# Altium PCB MED_BOX.PcbDoc
Units mm, origin at the board's own origin, x right, y up, seen from the top; angles counter-clockwise.
Board outline 45.42 x 83.83 mm, 2 copper layers (Top Layer, Bottom Layer); 54 components, 50 nets, 225 pads, 235 vias.
Unrouted connection lines stored in the file: 5.
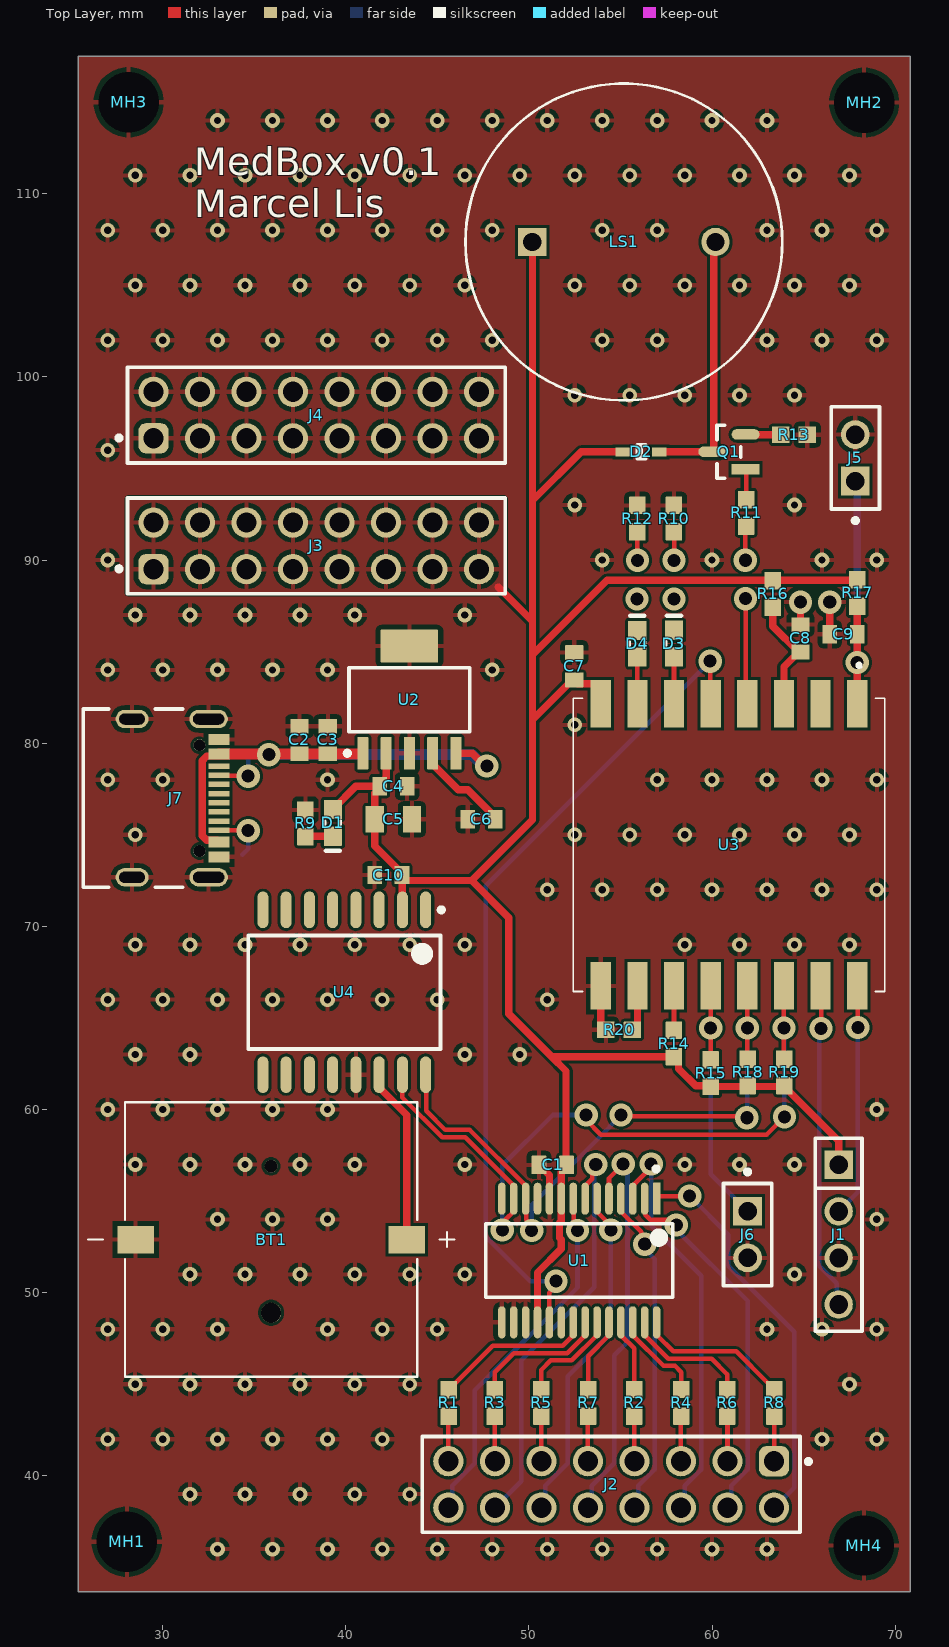
[diagram p0: Top Layer view]
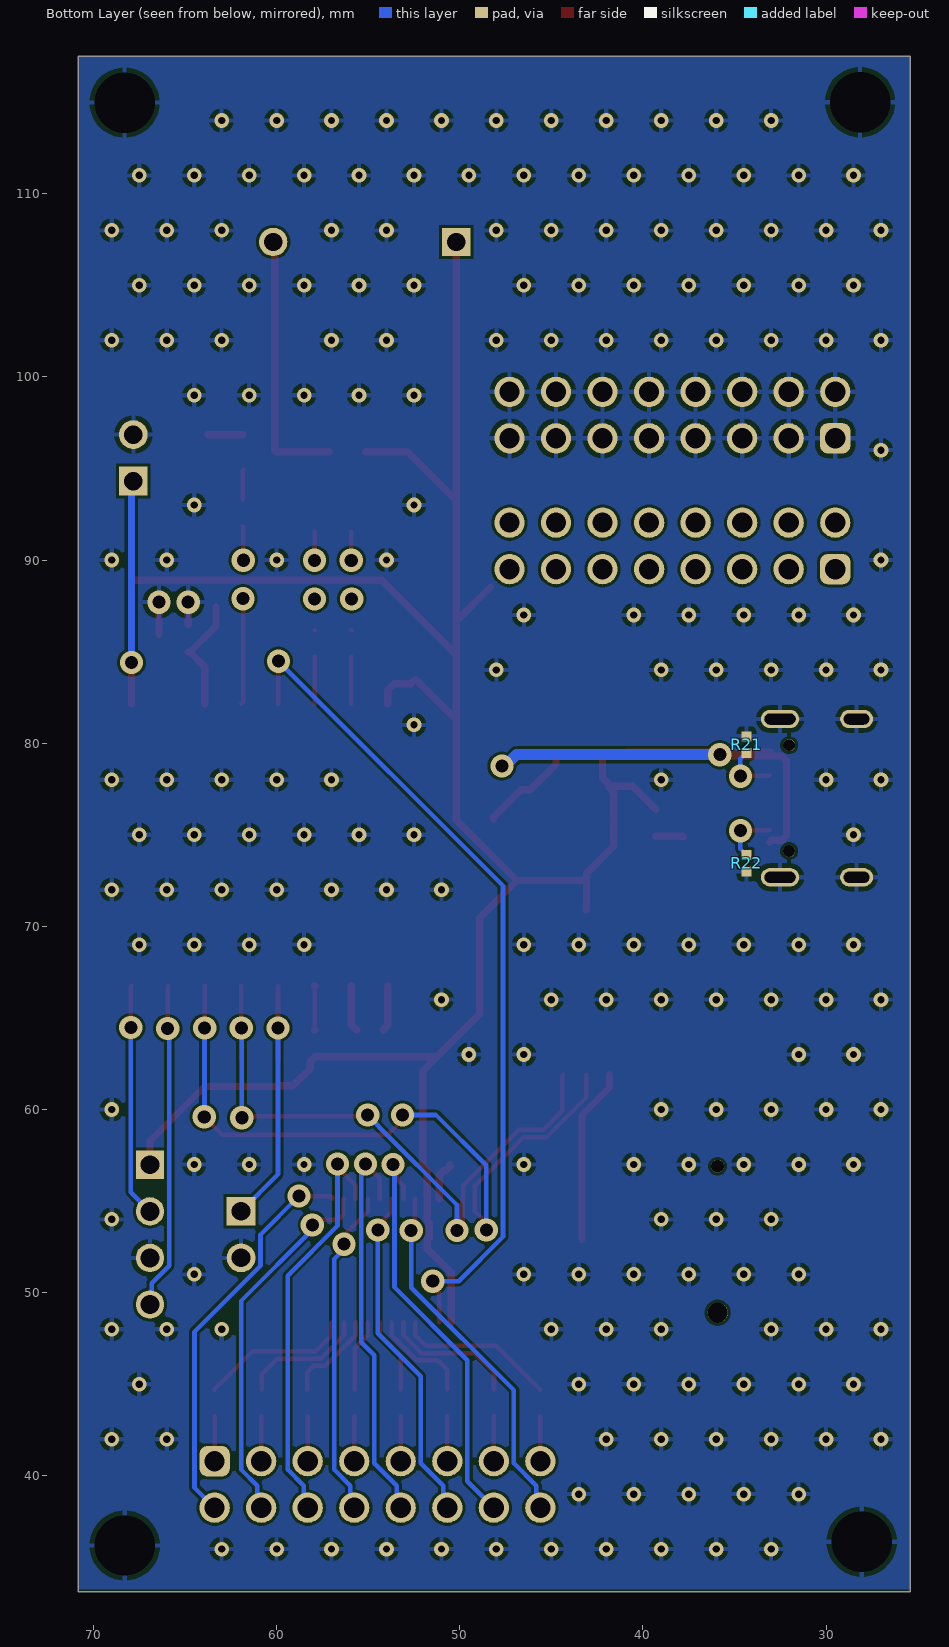
[diagram p1: Bottom Layer view, seen from below]
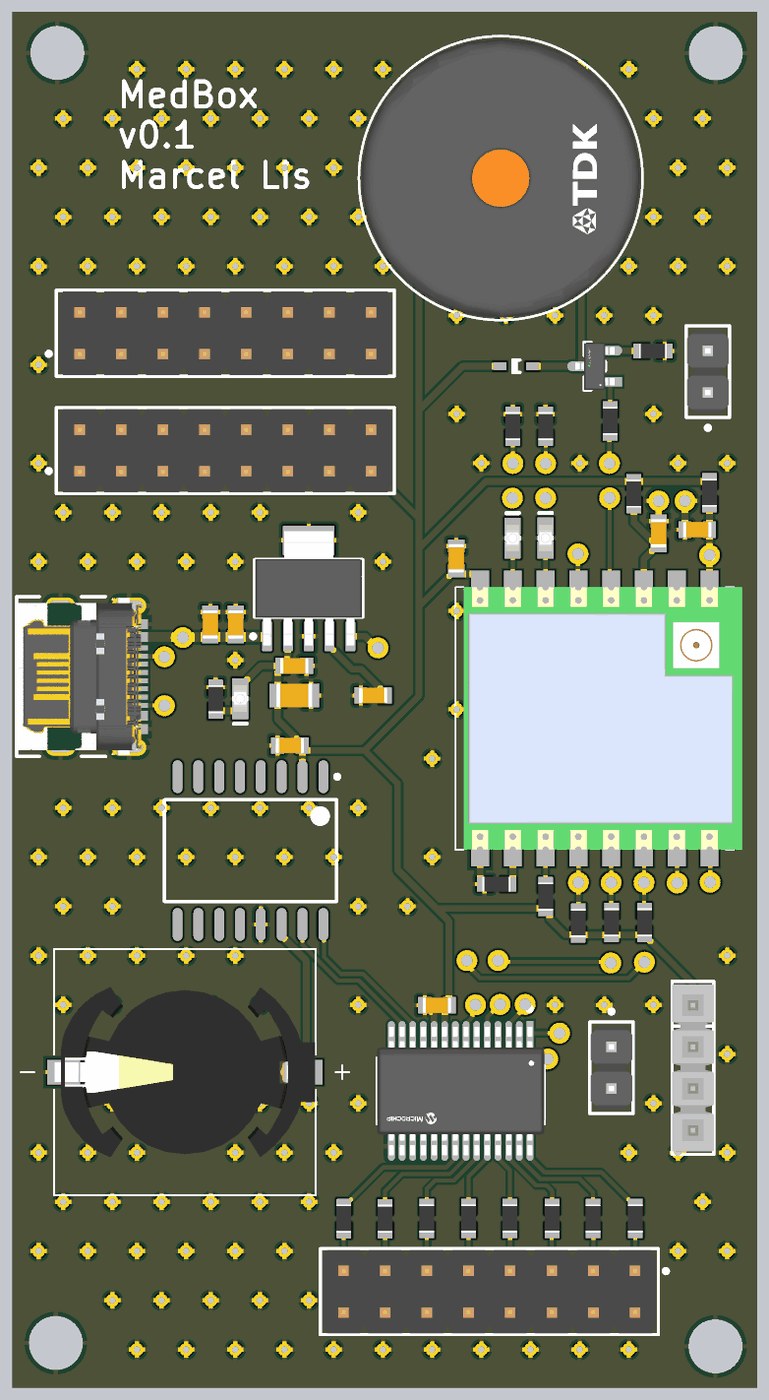
[diagram p2: 3D render of the assembled board from above, using the file's embedded part models]

## Layer stack, top to bottom
Top Solder: solder mask 0.0102, Solder Resist, Dk 3.5
Top Layer: signal copper 0.0356
Dielectric 1: dielectric 0.32, FR-4, Dk 4.8
Bottom Layer: signal copper 0.0356
Bottom Solder: solder mask 0.0102, Solder Resist, Dk 3.5

## Board outline
25.4,33.675 25.4,117.5 70.825,117.5 70.825,33.675

## Design rules (kind name [scope] priority, off if disabled: settings)
Clearance [All] p1: gap=0.15 ignorepadtopadclearanceinfootprint=FALSE
PlaneConnect [All] p1: planeconnectstyle=Direct reliefexpansion=0.508 reliefentries=4 reliefconductorwidth=0.254 reliefairgap=0.254
PolygonConnect [All] p1: connectstyle=Relief reliefconductorwidth=0.254 reliefentries=4 polygonreliefangle="90 Angle" airgapwidth=0.254
RoutingVias [All] p1: holewidth=0.3 width=0.6 viastyle="Through Hole" minholewidth=0.3 minwidth=0.6 maxholewidth=0.3 maxwidth=0.6
SolderMaskExpansion [All] p1: expansion=0.102 istentingtop=FALSE
SupplyNets "Schematic Supply Nets_2" [InNet('GND')] p1: voltage=0.000
SupplyNets "Schematic Supply Nets_1" [InNet('VCC')] p2: voltage=0.000
SupplyNets "Schematic Supply Nets" [InNet('+V_USB')] p3: voltage=0.000
Width [All] p1: maxlimit=0.8 minlimit=0.2 preferedwidth=0.25 minimp=50.000000 maximp=50.000000 favimp=50.000000
29 further rules are at their usual default settings.

## Classes and differential pairs
component class USB: J7 R21 R22
component class RTC: BT1 C10 U4
component class MED_BOX: J1 J2 J3 J4 MH1 MH2 MH3 MH4
component class Designator: C1 R1 R2 R3 R4 R5 R6 R7 R8 U1

## Components (designator, comment, footprint, x,y, rotation, side; value= is the part's Value field where it differs from the comment)
BT1 "1072" BAT_1072 35.925,52.9 r180 top
C1 "100n" C0603 51.3,56.975 r0 top
C2 "1u" C0603 37.474,80.175 r270 top
C3 "100n" C0603 39.025,80.175 r270 top
C4 "100n" C0603 42.6,77.65 r180 top
C5 "10u" C0805 42.6,75.85 r180 top
C6 "10n" C0603 47.411,75.85 r0 top
C7 "100n" C0603 52.475,84.2 r270 top
C8 "100n" C0603 64.825,85.725 r270 top
C9 "100n" C0603 67.175,85.95 r0 top
C10 "100n" C0603 42.325,72.8 r0 top
D1 "LED" LED0603 39.3,75.65 r90 top
D2 "1N4148WT" FAIR-SOD-523F-2_V 56.125,95.907 r0 top
D3 "LED" LED0603 57.921,85.441 r270 top
D4 "LED" LED0603 55.919,85.433 r270 top
J1 "GoldPin 4x1" SMTC-TSW-104-08-X-S 66.912,56.975 r270 top
J2 "61301621121" 61301621121 54.491,39.528 r180 top
J3 "61301621121" 61301621121 38.39,90.77 r0 top
J4 "61301621121" 61301621121 38.39,97.916 r0 top
J5 "M20-9990246" FP-M20-9990246-MFG 67.821,95.578 r90 top
J6 "M20-9990246" FP-M20-9990246-MFG 61.94,53.17 r270 top
J7 "USB4105-GF-A" FP-USB4105-GF-A-MFG 29.499,76.998 r270 top
LS1 "LD-BZPN-1307-A" FP-PS1720P02-MFG 55.187,107.365 r0 top
MH1 "M3 Mounting Hole" "Copy of M4 Mounting Hole" 28.05,36.4 r0 top
MH2 "M3 Mounting Hole" "Copy of M4 Mounting Hole" 68.3,114.975 r0 top
MH3 "M3 Mounting Hole" "Copy of M4 Mounting Hole" 28.144,114.994 r0 top
MH4 "M3 Mounting Hole" "Copy of M4 Mounting Hole" 68.288,36.194 r0 top
Q1 "BSS138" FP-318-08-IPC_B 60.92,95.907 r180 top
R1 "330R" R0603 45.621,43.979 r270 top
R2 "330R" R0603 55.743,43.985 r270 top
R3 "330R" R0603 48.133,43.977 r270 top
R4 "330R" R0603 58.317,43.987 r270 top
R5 "330R" R0603 50.676,43.986 r270 top
R6 "330R" R0603 60.818,43.98 r270 top
R7 "330R" R0603 53.23,43.984 r270 top
R8 "330R" R0603 63.406,43.985 r270 top
R9 "1k" R0603 37.8,75.625 r270 top
R10 "1k" R0603 57.921,92.259 r90 top
R11 "1k" R0603 61.86,92.575 r270 top
R12 "1k" R0603 55.919,92.259 r90 top
R13 "10k" R0603 64.469,96.836 r180 top
R14 "10k" R0603 57.921,63.6 r270 top
R15 "10k" R0603 59.926,61.983 r270 top
R16 "10k" R0603 63.312,88.152 r90 top
R17 "10k" R0603 67.925,88.2 r90 top
R18 "4k7" R0603 61.94,62.025 r270 top
R19 "4k7" R0603 63.95,62.025 r270 top
R20 "10k" R0603 54.925,64.35 r0 top
R21 "5k1" R0402 34.35,79.925 r90 bottom
R22 "5k1" R0402 34.35,73.45 r270 bottom
U1 "MCP23017T-E/SS" FP-C04-073-IPC_C 52.746,51.756 r270 top
U2 "TPS73718DCQR" DCQ0006A_L 43.475,82.375 r90 top
U3 "ESP8266_ESP-07" ESP8266ESP07 60.925,74.45 r270 top
U4 "DS3231SN#" W16#H2_L 39.92,66.4 r270 top

## Footprints (in the part's own frame and the unit in brackets; to place one, negate y for a bottom-side part, rotate by r counter-clockwise, add the part's x,y. Pads: shape width x height; smd on the part's side, far side on the other; paste and mask are expansions set on the pad)
61301621121 [mm] "Pin Header, pitch 2.54 mm, THT, Vertical, dual row, 16p"
  rrect50% 1.65x1.65 hole 1.1: 1(-8.89,-1.27)
  round 1.65 hole 1.1: 2(-8.89,1.27) 3(-6.35,-1.27) 4(-6.35,1.27) 5(-3.81,-1.27) 6(-3.81,1.27) 7(-1.27,-1.27) 8(-1.27,1.27) 9(1.27,-1.27) 10(1.27,1.27) 11(3.81,-1.27) 12(3.81,1.27) 13(6.35,-1.27) 14(6.35,1.27) 15(8.89,-1.27) 16(8.89,1.27)
  silkscreen extent -10.89,-2.62 10.31,2.62, body extent -10.16,-2.54 10.16,2.54, height 8.59
BAT_1072 [mm]
  rect 2x1.5 smd: N(7.4,0) P(-7.4,0)
  round 1.1 hole 1.1 unplated: ""(0,4)
  round 0.7 hole 0.7 unplated: ""(0,-4)
  silkscreen extent -10,-7.5 10,7.5, body extent -7.95,-5.2 7.95,5.2, height 3.75
C0603 [mm] "Generic 0603 SMD Ceramic Capacitor Footprint"
  rrect5% 0.8x1 smd: 1(-0.75,0) 2(0.75,0)
  body extent -0.87,-0.48 0.87,0.48, height 0.95
C0805 [mm] "Generic 0805 SMD Ceramic Capacitor Footprint"
  rrect5% 1x1.45 smd: 1(-1.016,0) 2(1.016,0)
  body extent -1.1,-0.72 1.1,0.72, height 1.45
"Copy of M4 Mounting Hole" [mm]
  round 0 hole 3.3 unplated mask+0.051: 1(0,0)
DCQ0006A_L [mm] "SOT223, 6-Leads, Body 6.55x3.55mm, Pitch 1.27mm, IPC High Density"
  rrect17% 1.8x0.6 smd: 1(-2.925,2.54) 2(-2.925,1.27) 3(-2.925,0) 4(-2.925,-1.27) 5(-2.925,-2.54)
  rrect6% 1.8x3.15 smd: 6(2.925,0)
  silkscreen extent -3.05,-3.3 1.75,3.51, body extent -3.48,-3.25 3.48,3.25, height 1.64
ESP8266ESP07 [mm]
  rect 2.6x1.1 smd: 1(-7.7,7) 2(-7.7,5) 3(-7.7,3) 4(-7.7,1) 5(-7.7,-1) 6(-7.7,-3) 7(-7.7,-5) 8(-7.7,-7) 9(7.7,-7) 10(7.7,-5) 11(7.7,-3) 12(7.7,-1) 13(7.7,1) 14(7.7,3) 15(7.7,5) 16(7.7,7)
  silkscreen extent -9.9,-8.5 8,8.5, body extent -8,-8 8,9, height 2.21
FAIR-SOD-523F-2_V [mm] "SMD, 2-Leads, Body 1.2x0.8mm, Height 0.7mm"
  rect 0.8x0.5 smd: 1(-1,0) 2(1,0)
  silkscreen extent -0.2,-0.38 0.24,0.38, body extent -0.6,-0.4 0.6,0.4, height 0.71
FP-318-08-IPC_B [mm]
  rect 1.524x0.578 smd paste+0 mask+0: 1(-0.91,0.95)
  rrect100% 1.524x0.578 smd paste+0 mask+0: 2(-0.91,-0.95) 3(0.91,0)
  silkscreen extent -0.65,-1.45 0.65,1.45, body extent -1.92,-1.7 1.92,1.7, height 0.25
FP-C04-073-IPC_C [mm]
  rect 1.753x0.415 smd paste+0 mask+0: 1(-3.375,4.225)
  rrect100% 1.753x0.415 smd paste+0 mask+0: 2(-3.375,3.575) 3(-3.375,2.925) 4(-3.375,2.275) 5(-3.375,1.625) 6(-3.375,0.975) 7(-3.375,0.325) 8(-3.375,-0.325) 9(-3.375,-0.975) 10(-3.375,-1.625) 11(-3.375,-2.275) 12(-3.375,-2.925) 13(-3.375,-3.575) 14(-3.375,-4.225) 15(3.375,-4.225) 16(3.375,-3.575) 17(3.375,-2.925) 18(3.375,-2.275) 19(3.375,-1.625) 20(3.375,-0.975) 21(3.375,-0.325) 22(3.375,0.325) 23(3.375,0.975) 24(3.375,1.625) 25(3.375,2.275) 26(3.375,2.925) 27(3.375,3.575) 28(3.375,4.225)
  silkscreen extent -5.13,-5.1 2,5.1, body extent -4.35,-5.2 4.35,5.2, height 0.25
FP-M20-9990246-MFG [mm]
  rect 1.57x1.57 hole 1.02 paste-2539.97 mask+0: 1(-1.27,0)
  round 1.57 hole 1.02 paste-2539.97 mask+0: 2(1.27,0)
  silkscreen extent -3.55,-1.32 2.79,1.32, body extent -2.89,-1.42 2.89,1.42, height 0.25
FP-PS1720P02-MFG [mm]
  rect 1.55x1.55 hole 1 paste-2539.97 mask+0: 1(-5,0)
  round 1.55 hole 1 paste-2539.97 mask+0: 2(5,0)
  silkscreen extent -8.65,-8.65 8.65,8.65, body extent -8.75,-8.75 8.75,8.75, height 0.25
FP-USB4105-GF-A-MFG [mm]
  rrect100% 1x2.1 hole 1.7 slot 0.6 at 0 deg paste-2539.97 mask+0: 1(-4.32,3.015) 2(4.32,3.015)
  rrect100% 1x1.8 hole 1.4 slot 0.6 at 0 deg paste-2539.97 mask+0: 3(-4.32,-1.165) 4(4.32,-1.165)
  rect 0.6x1.15 smd paste+0 mask+0: A1-B12(-3.2,3.59) A4-B9(-2.4,3.59) B1-A12(3.2,3.59) B4-A9(2.4,3.59)
  rect 0.3x1.15 smd paste+0 mask+0: A5(-1.25,3.59) A6(-0.25,3.59) A7(0.25,3.59) A8(1.25,3.59) B5(1.75,3.59) B6(0.75,3.59) B7(-0.75,3.59) B8(-1.75,3.59)
  round 0.65 hole 0.65 unplated paste-2539.97 mask+0: ""(-2.89,2.515) ""(2.89,2.515)
  silkscreen extent -4.86,-3.84 4.86,1.59, body extent -4.96,-3.94 4.96,4.27, height 0.25
LED0603 [mm] "0603 LED footprint"
  rrect5% 1.05x1 smd: A(0.725,0) K(-0.725,0)
  silkscreen extent -1.52,-0.42 0.11,0.43, body extent -0.81,-0.41 0.81,0.41, height 0.95
R0402 [mm] "Generic 0402 Resistor Footprint"
  rrect5% 0.55x0.55 smd: 1(-0.45,0) 2(0.45,0)
  body extent -0.53,-0.28 0.53,0.28, height 0.37
R0603 [mm] "Generic 0603 Resistor Footprint"
  rrect5% 0.95x0.9 smd: 1(-0.725,0) 2(0.725,0)
  body extent -0.85,-0.45 0.85,0.45, height 0.55
SMTC-TSW-104-08-X-S [mm] ".025 SQ Post Terminal Strip Assembly, 1x4 Pins, Vertical, 2.54mm Pitch, Male"
  rect 1.55x1.55 hole 1.02: 1(0,0)
  round 1.55 hole 1.02: 2(2.54,0) 3(5.08,0) 4(7.62,0)
  silkscreen extent -1.46,-1.27 9.08,1.27, body extent -1.27,-1.27 8.89,1.27, height 8.38
W16#H2_L [mm] "SOIC, 16-Leads, Body 10.3x7.5mm, Pitch 1.27mm, IPC High Density"
  oval 2x0.6 smd: 1(-4.5,4.445) 2(-4.5,3.175) 3(-4.5,1.905) 4(-4.5,0.635) 5(-4.5,-0.635) 6(-4.5,-1.905) 7(-4.5,-3.175) 8(-4.5,-4.445) 9(4.5,-4.445) 10(4.5,-3.175) 11(4.5,-1.905) 12(4.5,-0.635) 13(4.5,0.635) 14(4.5,1.905) 15(4.5,3.175) 16(4.5,4.445)
  silkscreen extent -4.62,-5.25 3.1,5.42, body extent -3.8,-5.25 3.8,5.25, height 2.65

## Part data
BT1: "Battery Holder CR1220/1225", Package="NON STANDARD-2 Keystone", Check_prices=https://www.snapeda.com/parts/1072/Keystone/view-part/?ref=eda, MF="Keystone Electronics", MP=1072, SnapEDA_Link=https://www.snapeda.com/parts/1072/Keystone/view-part/?ref=snap
C1 C2 C3 C4 C6 C7 C8 C9 C10: library part CMP-00024-8, "Generic 0603 SMD Ceramic Capacitor"
C5: library part CMP-00025-5, "Generic 0805 SMD Ceramic Capacitor"
D1 D3 D4: library part CMP-00036-7, "0603 LED"
D2: library part CMP-0881-00001-1, "High Conductance Fast Switching Diode, 75 V, -55 to 150 degC, 2-Pin SOD523F, RoHS", Manufacturer="Fairchild Semiconductor", Temperature Range="-55 to 150 degC", BVR (IR="5 uA)=75 V Min.", CO="4 pF Max.", ComponentLink1Description="Manufacturer URL", ComponentLink1URL=http://www.fairchildsemi.com/, ComponentLink2Description=Datasheet, ComponentLink2URL=http://www.fairchildsemi.com/ds/1N/1N4148WT.pdf, DatasheetVersion="Rev. A2", IR (VR="75 V)=5 uA Max.", Mounting Technology="Surface Mount", PackageDescription="2-Pin Surface Mount Device, Body 1.2 x 0.8 mm, Height 0.7 mm", PackageReference=SOD-523F-2, PartNumber=1N4148WT, RoHS=TRUE, VF="1 V Max."
J1: library part CMP-00067-4, "TSW - Samtec 2.54mm Pin Header 13.46mm Overall Pin Length 5.08mm Tail (08) (mcv)(TO22)", Manufacturer=Molex
J2 J3 J4: library part CMP-1502-01097-4, "THT Vertical Pin Header WR-PHD, Pitch 2.54 mm, Dual Row, 16 pins", Color=Black, Contact Resistance=20mΩ, Current Rating=3A, Max Operating Temperature=105°C, Min Operating Temperature=-40°C, Operating Supply Voltage=250V, Connector Type="Male Pin", Contact Material=Gold, Contact Mating Length=5.9944mm, Contact Plating=Gold, Gender=Male, Height=8.89mm, Lead Pitch=2.54mm, Mount="Through Hole", Number Of Contacts=16, Number of Pins=16, Number of Positions=16, Number Of Rows=2, Orientation=Vertical, Packaging=Bulk, Pitch=2.54mm, RoHS=Compliant, Row Spacing=2.54mm, Termination=Solder, Voltage Rating=250V
J5 J6: library part CMP-15831-000009-1, "CONN HEADER VERT 2POS 2.54MM", Current Rating=3A, Manufacturer=Harwin, Temperature="-40°C to +105°C", Temperature Range High=+105°C, Temperature Range Low=-40°C, Automotive=No, Category=Conn, ComponentLink2Description=Datasheet, ComponentLink2URL=https://cdn.harwin.com/pdfs/M20-999.pdf, Conn Gender=Male, Conn Orientation=Vertical, Contact Material=Tin,Nickel, Device Class L1=Connectors, Device Class L2="Headers and Wire Housings", Device Class L3=unset, Digikey Description="CONN HEADER VERT 2POS 2.54MM", Height=8.99mm, Lead Free=Yes, Manufacturer Part Number=M20-9990246, Mouser Description="2.54mm (0.1\") Pitch SIL Vertical PC Tail Pin Header, 6.1mm mating pin height, tin, 2 contacts", Number Of Contacts=2, Number Of Rows=1, Octopart=https://octopart.com/m20-9990246-harwin-2590635, Package=M20-9990246, Pitch=2.54mm, RoHS=TRUE
J7: library part CONN-00045-1, "USB Connector, 24 Contact(s), Female, Right Angle, Solder Terminal, Locking, Receptacle", Manufacturer=GCT, Manufacturer PN=USB4105-GF-A, Supplier=Mouser, Supplier PN=640-USB4105-GF-A
LS1: library part CMP-08413-000001-1, "AUDIO PIEZO TRANSDUCER 30V TH", Frequency=2kHz, Manufacturer="TDK Corporation", Manufacturer Part Number=PS1720P02, Package=0, Temperature="-10°C to +70°C", Temperature Range High=+70°C, Temperature Range Low=-10°C, Automotive=No, Category=Speak, ComponentLink2Description=Datasheet, ComponentLink2URL=https://product.tdk.com/info/en/catalog/datasheets/piezoelectronic_buzzer_ps_en.pdf, Device Class L1=Electromechanical, Device Class L2="Audio Products", Device Class L3=Buzzers, Digikey Description="AUDIO PIEZO TRANSDUCER 30V TH", Height=8.3mm, Lead Free=Yes, Mouser Description="Audio Indicators & Alerts Round 17mmx8mm 2 kHz Vin=3V", Octopart=https://octopart.com/ps1720p02-tdk-154429, RoHS=TRUE, Standoff Height=0.5mm
MH1 MH2 MH3 MH4: library part CONN-00002-1, Manufacturer=Molex
Q1: library part CMP-07173-000101-1, "MOSFET N-CH 50V 220MA SOT-23", Case/Package=SOT-23, Continuous Drain Current (ID)=220mA, Drain to Source Breakdown Voltage=50V, Drain to Source Resistance=3.5R, Gate to Source Voltage (Vgs)=20V, Input Capacitance=27pF, Max Operating Temperature=150°C, Max Power Dissipation=360mW, Min Operating Temperature=-55°C, On-State Resistance=6R, Package Quantity=1, Threshold Voltage=1.3V, Contact Plating=Tin, Current Rating=220mA, Drain to Source Voltage (Vdss)=50V, Dual Supply Voltage=50V, Element Configuration=Single, Fall Time=9ns, Height=0.93mm, Lead Free="Lead Free", Length=2.92mm, Mount="Surface Mount", Nominal Vgs=1.3V, Number of Elements=1, Number of Pins=3, Packaging="Tape and Reel", Power Dissipation=360mW, Radiation Hardening=No, Rds On Max=3.5R, REACH SVHC="No SVHC", Rise Time=9ns, Termination=SMD/SMT, Turn-Off Delay Time=20ns, Turn-On Delay Time=2.5ns, Voltage Rating (DC)=50V, Weight=0.03g, Width=1.3mm
R1 R2 R3 R4 R5 R6 R7 R8 R9 R10 R11 R12 R13 R14 R15 R16 R17 R18 R19 R20: library part CMP-00017-10, "Generic 0603 SMD Resistor"
R21 R22: library part CMP-00016-10, "Generic 0402 SMD Resistor"
U1: library part CMP-0186-00065-3, "IC I/O EXPANDER 16BIT I2C 28SSOP", Case/Package=SSOP, Frequency=1.7MHz, Max Frequency=10MHz, Max Operating Temperature=125°C, Min Operating Temperature=-40°C, Nominal Supply Current=1mA, Operating Supply Voltage=5.5V, Output Current=25mA, Package Quantity=2100, Power Dissipation=700mW, Interface=I2C, Lead Free="Lead Free", Mount="Surface Mount", Number of Bits=16, Number of Channels=1, Number of I/Os=16, Number of Pins=28, Packaging="Tape and Reel"
U2: library part CMP-0395-00291-2, "Single Output LDO, 1 A, Fixed 1.8 V Output, 2.2 to 5.5 V Input, with Reverse Current Protection, 6-pin SOT-223 (DCQ), -40 to 125 degC, Green (RoHS & no Sb/Br)", Manufacturer="Texas Instruments", Rating=Catalog, Accuracy(%)=3, ComponentLink1Description="Manufacturer URL", ComponentLink1URL=http://www.ti.com/, ComponentLink2Description=Datasheet, ComponentLink2URL=http://www.ti.com/general/docs/lit/getliterature.tsp?genericPartNumber=TPS73718&fileType=pdf, ComponentLink3Description="Package Specification", ComponentLink3URL=http://www.ti.com/litv/pdf/mpds098c, DatasheetVersion=SBVS067O, Eco-Plan="Green (RoHS & no Sb/Br)", Fixed Output Options(V)=1.8, Iout(Max)(A)=1, Iq(Typ)(mA)=0.3, Mounting Technology="Surface Mount", PackageDescription="6-Pin Plastic Small Outline, Body 3.5 x 6.5 mm, Pitch 1.27 mm", PackageReference=DCQ0006A, PackageVersion=4202109/D, PartNumber=TPS73718DCQR, SubFamily="Single Channel LDO", Vdo(Typ)(mV)=130, Vin(Max)(V)=5.5, Vin(Min)(V)=2.2, Vout Adj(Max)(V)=1.8, Vout Adj(Min)(V)=1.8
U3: "Connector", Manufacturer_Name=Ai-Thinker, Manufacturer_Part_Number="ESP8266 ESP-07", Datasheet Link=http://datasheet.octopart.com/ESP-07S-RF-Solutions-datasheet-104506015.pdf, Height=3mm
U4: library part CMP-0254-00293-2, "Extremely Accurate I2C-Integrated Real-Time Clock/TCXO/Crystal, 16-Pin SO, -40 to 85 degC, RoHS Qualified", Code_IPC=SOIC127P1030-16, Code_JEDEC=MS-013-AA, ComponentLink1Description="Manufacturer URL", ComponentLink1URL=http://www.maxim-ic.com, ComponentLink2Description=Datasheet, ComponentLink2URL=http://datasheets.maxim-ic.com/en/ds/DS3231.pdf, ComponentLink3Description="Package Specification", ComponentLink3URL=http://pdfserv.maxim-ic.com/package_dwgs/21-0042.PDF, DatasheetVersion="Rev 8, Jul-2010", PackageDescription="16-Pin Small-Outline IC, Wide (0.3in), 1.27 mm Pitch, SOIC (W), RoHS Qualified", PackageReference=W16#H2, PackageVersion="revD, 2010"

## Via types
v1: diameter 0.8, hole 0.4, Top Layer to Bottom Layer, 201 vias
v2: diameter 1.27, hole 0.711, Top Layer to Bottom Layer, 34 vias

## Nets (pads, with @x,y where several pads share a name; then routed paths per layer and width w, separated by ;. In a path a pad name is that pad's centre, name@x,y a point inside that pad or via, vN(x,y) a via of type N, cw(c..) or ccw(c..) an arc to the next point about the centre after c; other vN are vias at no path point)
+V_USB: C2.2 C3.2 J7.A4-B9 J7.B4-A9 U2.1 U2.5 | length 28.2
  Top Layer w0.4: J7.B4-A9 32.989,74.698 32.419,74.698 32.164,74.954 32.164,79.043 32.419,79.298 32.989,79.298 J7.A4-B9 ; U2.1@40.883,79.398 U2.1 ; U2.5 46.915,79.45 47.615,78.75 v2(47.7,78.75)
  Top Layer w0.6: J7.A4-B9 U2.1@40.883,79.398
  Bottom Layer w0.6: v2(35.8,79.375) 46.894,79.375 47.519,78.75 v2(47.7,78.75)
A0: R1.1 U1.21 | length 8.7
  Top Layer w0.25: R1.1 45.621,44.729 45.946,45.054 45.971,45.054 48.017,47.1 51.842,47.1 52.421,47.679 U1.21
A1: R3.1 U1.22 | length 7.4
  Top Layer w0.25: R3.1 48.133,45.658 49.175,46.7 52.092,46.7 53.071,47.679 U1.22
A2: R5.1 U1.23 | length 5.6
  Top Layer w0.25: R5.1 50.676,45.776 51.2,46.3 52.342,46.3 53.721,47.679 U1.23
A3: R7.1 U1.24 | length 4.1
  Top Layer w0.25: R7.1 53.23,46.538 54.371,47.679 U1.24
A4: R2.1 U1.25 | length 4
  Top Layer w0.25: U1.25 55.021,47.679 55.743,46.957 R2.1
A5: R4.1 U1.26 | length 5.1
  Top Layer w0.25: U1.26 55.671,47.679 57.35,46 57.975,46 58.317,45.658 R4.1
A6: R6.1 U1.27 | length 6.9
  Top Layer w0.25: U1.27 56.321,47.679 57.6,46.4 59.973,46.4 60.818,45.555 R6.1
A7: R8.1 U1.28 | length 8.4
  Top Layer w0.25: U1.28 57.021,48.33 57.021,47.654 57.875,46.8 61.316,46.8 63.056,45.06 63.081,45.06 63.406,44.735 R8.1
BOOT: J6.1 R15.1 U3.12 | length 14.9
  Top Layer w0.25: U3.12 v2(59.925,64.45) 59.925,62.709 R15.1
  Bottom Layer w0.25: v2(59.925,64.45) 59.925,56.455 J6.1
BUTTON_B0: J2.2 U1.1 | length 21.7
  Top Layer w0.25: U1.1 56.971,55.193 57.053,55.275 v2(58.775,55.275)
  Bottom Layer w0.25: v2(58.775,55.275) 60.88,53.17 60.88,51.461 64.481,47.859 64.481,39.358 J2.2
BUTTON_B1: J2.4 U1.2 | length 20.3
  Top Layer w0.25: U1.2 56.352,55.099 56.352,54.248 56.621,53.979 57.495,53.979 57.774,53.7 v2(58.05,53.7)
  Bottom Layer w0.25: v2(58.05,53.7) 58.05,53.438 61.941,49.546 61.941,40.342 61.057,39.458 61.057,38.474 J2.4
BUTTON_B2: J2.6 U1.3 | length 22.7
  Top Layer w0.25: U1.3 55.671,55.844 56.675,56.849 v2(56.675,57.025)
  Bottom Layer w0.25: v2(56.675,57.025) 56.675,53.65 59.401,50.924 59.401,40.342 58.517,39.458 58.517,38.474 J2.6
BUTTON_B3: J2.8 U1.4 | length 18.1
  Top Layer w0.25: U1.4 55.021,54.429 56.13,53.32 56.13,52.845 v2(56.325,52.65)
  Bottom Layer w0.25: J2.8 55.977,38.474 55.977,39.458 56.861,40.342 56.861,51.838 56.325,52.374 v2(56.325,52.65)
BUTTON_B4: J2.10 U1.5 | length 22
  Top Layer w0.25: U1.5 54.371,56.246 v2(55.15,57.025)
  Bottom Layer w0.25: J2.10 53.437,38.474 53.437,39.458 54.661,40.682 54.661,46.579 55.383,47.3 55.383,56.516 55.15,56.749 v2(55.15,57.025)
BUTTON_B5: J2.12 U1.6 | length 18.8
  Top Layer w0.25: U1.6 53.721,54.417 54.472,53.666 v2(54.472,53.425)
  Bottom Layer w0.25: J2.12 50.897,38.474 50.897,39.458 52.121,40.682 52.121,45.437 54.472,47.788 v2(54.472,53.425)
BUTTON_B6: J2.14 U1.7 | length 23.1
  Top Layer w0.25: U1.7 53.071,55.844 53.455,56.228 53.455,56.805 v2(53.65,57)
  Bottom Layer w0.25: J2.14 49.581,39.698 49.581,46.312 53.562,50.293 53.562,56.912 v2(53.65,57)
BUTTON_B7: J2.16 U1.8 | length 19.9
  Top Layer w0.25: U1.8 52.449,55.102 52.449,53.879 52.652,53.676 v2(52.652,53.4)
  Bottom Layer w0.25: J2.16 45.817,38.474 45.817,39.458 47.041,40.682 47.041,44.666 52.652,50.277 v2(52.652,53.4)
BUZZER: R11.2 U3.4 | length 7.7
  Top Layer w0.25: v2(61.816,89.987) 61.816,91.806 R11.2 ; v2(61.832,87.887) 61.832,82.243 U3.4
EN: C8.2 R16.1 U3.3 | length 6.3
  Top Layer w0.4: R16.1 63.312,86.388 C8.2@64.725,84.975 ; U3.3 63.925,84.175 C8.2@64.725,84.975 ; C8.2 C8.2@64.725,84.975
GND: BT1.N C1.1 C2.1 C3.1 C4.1 C5.1 C6.1 C7.1 C8.1 C9.1 C10.1 J1.3 J4.1 J4.2 J4.3 J4.4 J4.5 J4.6 J4.7 J4.8 J4.9 J4.10 J4.11 J4.12 J4.13 J4.14 J4.15 J4.16 J5.2 J6.2 J7.1 J7.2 J7.3 J7.4 J7.A1-B12 J7.B1-A12 MH1.1 MH2.1 MH3.1 MH4.1 R9.1 R10.2 R12.2 R13.1 R20.1 R21.2 R22.2 U1.10 U1.15 U1.16 U1.17 U2.3 U2.6 U3.9 U4.13 | length 7.6
  Top Layer w0.4: C1.1 50.55,56.875 50.75,56.675 50.85,56.675 51.121,56.404 U1.10 ; U3.9 53.925,64.6 54.175,64.35 R20.1@54.179,64.35 ; C8.1 v2(64.825,87.7) ; C9.1 v2(66.425,87.7)
  other v1: 33,36 36,36 39,36 42,36 45,36 48,36 51,36 54,36 57,36 60,36 63,36 31.5,39 34.5,39 37.5,39 40.5,39 43.5,39 27,42 30,42 33,42 36,42 39,42 42,42 66,42 69,42 28.5,45 31.5,45 34.5,45 37.5,45 40.5,45 43.5,45 67.5,45 27,48 30,48 33,48 39,48 42,48 45,48 63,48 66,48 69,48 31.5,51 34.5,51 37.5,51 40.5,51 43.5,51 46.5,51 64.5,51 33,54 36,54 39,54 69,54 28.5,57 31.5,57 34.5,57 37.5,57 40.5,57 46.5,57 58.5,57 61.5,57 64.5,57 27,60 30,60 33,60 36,60 39,60 69,60 28.5,63 31.5,63 46.5,63 49.5,63 27,66 30,66 33,66 36,66 39,66 42,66 45,66 51,66 28.5,69 31.5,69 34.5,69 37.5,69 40.5,69 43.5,69 46.5,69 58.5,69 61.5,69 64.5,69 67.5,69 51,72 54,72 57,72 60,72 63,72 66,72 69,72 28.5,75 52.5,75 55.5,75 58.5,75 61.5,75 64.5,75 67.5,75 27,78 30,78 39,78 57,78 60,78 63,78 66,78 69,78 52.5,81 27,84 30,84 33,84 36,84 39,84 48,84 28.5,87 31.5,87 34.5,87 37.5,87 40.5,87 46.5,87 27,90 54,90 60,90 66,90 69,90 52.5,93 64.5,93 27,96 52.5,99 55.5,99 58.5,99 61.5,99 64.5,99 27,102 30,102 33,102 36,102 39,102 42,102 45,102 48,102 54,102 57,102 63,102 66,102 69,102 28.5,105 31.5,105 34.5,105 37.5,105 40.5,105 43.5,105 46.5,105 52.5,105 55.5,105 58.5,105 61.5,105 64.5,105 67.5,105 27,108 30,108 33,108 36,108 39,108 42,108 45,108 48,108 54,108 57,108 63,108 66,108 69,108 28.5,111 31.5,111 34.5,111 37.5,111 40.5,111 43.5,111 46.5,111 49.5,111 52.5,111 55.5,111 58.5,111 61.5,111 64.5,111 67.5,111 33,114 36,114 39,114 42,114 45,114 48,114 51,114 54,114 57,114 60,114 63,114
GPIO2: R14.1 U3.11 | length 2.4
  Top Layer w0.25: R14.1@57.923,64.327 U3.11@57.923,66.748
  Top Layer w0.4: R14.1 R14.1@57.923,64.327 ; U3.11@57.923,66.748 U3.11
GPIO12: D3.A U3.6 | length 2.6
  Top Layer w0.25: D3.A 57.921,82.154 U3.6
GPIO13: D4.A U3.7 | length 2.6
  Top Layer w0.25: D4.A 55.919,82.156 U3.7
GPIO15: R20.2 U3.10 | length 2.5
  Top Layer w0.4: R20.2@55.629,64.35 55.654,64.35 55.904,64.6 55.904,64.625 55.925,64.646 U3.10
LED_A0: J2.15 R1.2 | length 2.5
  Top Layer w0.25: J2.15 45.601,43.234 R1.2
LED_A1: J2.13 R3.2 | length 2.5
  Top Layer w0.25: R3.2 48.141,43.243 J2.13
LED_A2: J2.11 R5.2 | length 2.5
  Top Layer w0.25: R5.2 50.681,43.255 J2.11
LED_A3: J2.9 R7.2 | length 2.5
  Top Layer w0.25: J2.9 53.221,43.251 R7.2
LED_A4: J2.7 R2.2 | length 2.5
  Top Layer w0.25: R2.2 55.761,43.242 J2.7
LED_A5: J2.5 R4.2 | length 2.5
  Top Layer w0.25: J2.5 58.301,43.247 R4.2
LED_A6: J2.3 R6.2 | length 2.5
  Top Layer w0.25: R6.2 60.841,43.232 J2.3
LED_A7: J2.1 R8.2 | length 2.5
  Top Layer w0.25: J2.1 63.386,40.803 63.386,43.24 R8.2
NetC6_2: C6.2 U2.4 | length 5.3
  Top Layer w0.4: U2.4 44.745,78.85 46.145,77.45 46.661,77.45 48.161,75.95 C6.2
NetD1_K: D1.K R9.2 | length 1.5
  Top Layer w0.4: R9.2 37.813,74.913 39.288,74.913 D1.K
NetD2_2: D2.2 LS1.2 Q1.3 | length 14.4
  Top Layer w0.4: D2.2 Q1.3 60.016,95.907 60.099,95.989 60.099,107.276 LS1.2
NetD3_K: D3.K R10.1 | length 1.6
  Top Layer w0.25: D3.K D3.K@57.925,86.17 ; R10.1 57.925,91.53 v2(57.925,89.984)
  other v2: 57.925,87.875
NetD4_K: D4.K R12.1 | length 1.6
  Top Layer w0.25: D4.K@55.9,86.177 D4.K ; R12.1 55.925,91.528 v2(55.925,89.984)
  Bottom Layer w0.25: v2(55.9,87.875) v2@55.913,87.888 ; v2@55.912,89.971 v2(55.925,89.984)
NetJ7_A5: J7.A5 R21.1 | length 3
  Top Layer w0.25: J7.A5 33.114,78.224 34.651,78.224 v2(34.675,78.2)
  Bottom Layer w0.25: R21.1 34.675,79.15 v2(34.675,78.2)
NetJ7_B5: J7.B5 R22.1 | length 3.1
  Top Layer w0.25: J7.B5 33.101,75.237 34.663,75.237 v2(34.675,75.225)
  Bottom Layer w0.25: R22.1 34.675,74.225 v2(34.675,75.225)
NetQ1_1: Q1.1 R11.1 | length 1.7
  Top Layer w0.25: Q1.1@61.807,94.934 61.86,94.882 R11.1
NetQ1_2: Q1.2 R13.2 | length 1.9
  Top Layer w0.4: Q1.2 61.84,96.847 63.734,96.847 R13.2
NetU1_19: U1.19 U3.5 | length 46.1
  Top Layer w0.25: U1.19 51.121,49.995 51.475,50.349 v2(51.475,50.625) ; v2(59.9,84.475) 59.9,82.175 U3.5
  Bottom Layer w0.25: v2(51.475,50.625) 50.063,50.625 47.64,53.048 47.64,72.215 v2(59.9,84.475)
RST: C9.2 J5.1 R17.1 U3.1 | length 15.3
  Top Layer w0.4: U3.1 v2(67.925,84.4) C9.2 R17.1
  Bottom Layer w0.4: J5.1 67.925,94.204 v2(67.925,84.4)
SCL: R18.1 U1.12 U3.13 U4.16 | length 35.8
  Top Layer w0.25: U4.16 44.4,61.865 44.4,59.925 45.442,58.883 46.77,58.883 49.821,55.832 U1.12 49.852,55.099 49.852,53.974 50.15,53.676 v2(50.15,53.4) ; v2(55.025,59.7) 55.1,59.625 61.825,59.625 v2(61.9,59.55) ; U3.13 v2(61.925,64.45) 61.925,62.765 R18.1
  Bottom Layer w0.25: v2(50.15,53.4) 50.15,54.787 54.425,59.062 54.425,59.079 55.025,59.679 v2(55.025,59.7) ; v2(61.9,59.55) 61.912,59.562 61.912,64.438 v2(61.925,64.45)
SDA: R19.1 U1.13 U3.14 U4.15 | length 41.9
  Top Layer w0.25: U4.15 43.095,60.655 45.267,58.483 46.52,58.483 49.171,55.832 U1.13 49.171,54.429 48.745,54.004 48.745,53.62 v2(48.55,53.425) ; v2(53.125,59.7) 53.125,59.424 53.924,58.625 62.975,58.625 v2(63.95,59.6) ; U3.14 v2(63.925,64.45) 63.925,62.775 R19.1
  Bottom Layer w0.25: v2(48.55,53.425) 48.55,56.95 51.3,59.7 v2(53.125,59.7) ; v2(63.925,64.45) 63.937,64.438 63.937,59.612 v2(63.95,59.6)
UART_RX: J1.4 U3.15 | length 17.9
  Top Layer w0.25: U3.15 65.95,66.725 v2(65.95,64.425)
  Bottom Layer w0.25: v2(65.95,64.425) 65.862,64.337 65.862,51.46 66.818,50.505 66.818,49.45 J1.4
UART_TX: J1.2 U3.16 | length 12.8
  Top Layer w0.25: U3.16 67.961,66.714 v2(67.961,64.473)
  Bottom Layer w0.25: J1.2 67.962,55.485 67.962,64.472 v2(67.961,64.473)
VBAT: BT1.P U4.14 | length 9.6
  Top Layer w0.4: U4.14 41.825,61.2 43.325,59.7 BT1.P
VCC: C1.2 C4.2 C5.2 C7.2 C10.2 D1.A D2.1 J1.1 J3.1 J3.2 J3.3 J3.4 J3.5 J3.6 J3.7 J3.8 J3.9 J3.10 J3.11 J3.12 J3.13 J3.14 J3.15 J3.16 LS1.1 R14.2 R15.2 R16.2 R17.2 R18.2 R19.2 U1.9 U1.18 U2.2 U3.8 U4.2 | length 132.2
  Top Layer w0.4: D1.A 39.3,76.4 40.55,77.65 C4.2 41.85,77.55 41.584,77.284 C5.2 ; C5.2@41.584,75.625 41.584,74.391 43.075,72.9 C10.2 43.075,72.7 C10.2@43.085,72.69 ; C4.2@41.85,77.75 42.205,78.105 U2.2 ; U4.2 43.085,70.91 43.085,72.5 C10.2@43.085,72.69 ; 48.325,88.525 50.2,86.65 ; LS1.1 50.2,107.352 50.2,93.25 ; U1.18 50.471,51.104 51.771,52.404 51.771,52.889 51.667,52.992 51.667,53.808 51.768,53.908 51.768,55.128 U1.9 51.771,56.596 52.05,56.875 C1.2 52.025,57 52.025,62.1 51.25,62.875 ; U3.8 53.925,82.9 53.575,83.25 52.675,83.25 C7.2 52.375,83.45 50.2,81.275 50.2,81.225 ; D2.1 52.857,95.907 50.2,93.25 ; R14.2 R14.2@57.896,62.875 ; J1.1 66.912,58.281 64.211,60.983 64.186,60.983 63.936,61.233 63.936,61.258 61.94,61.258 R15.2 59.895,61.289 59.111,61.289 58.171,62.229 58.171,62.6 R14.2@57.896,62.875 ; R17.2@67.925,88.888 63.312,88.888 54.263,88.888 50.2,84.825 ; C10.2@43.085,72.69 43.275,72.5 46.875,72.5 ; 46.875,72.5 50.2,75.825 50.2,81.225 ; 46.875,72.5 48.9,70.475 48.9,65.225 51.25,62.875 ; 50.2,81.225 50.2,84.825 ; 50.2,84.825 50.2,86.65 ; 50.2,86.65 50.2,93.25 ; 51.25,62.875 R14.2@57.896,62.875
pads on no net: BT1. J7. J7.A6 J7.A7 J7.A8 J7.B6 J7.B7 J7.B8 U1.11 U1.14 U1.20 U3.2 U4.1 U4.3 U4.4 U4.5 U4.6 U4.7 U4.8 U4.9 U4.10 U4.11 U4.12

## Polygon pours and split planes (outlines as drawn)
GND on Top Layer "GND_L01_P013" (solid, pour order 13): 25.4,117.5 70.825,117.5 70.825,33.675 25.4,33.675
VCC on Top Layer "VCC_L01_P006" (solid, pour order 6): 28.1,93.375 28.1,88.175 48.675,88.175 48.675,93.375
GND on Bottom Layer "GND_L02_P012" (solid, pour order 12): 25.4,117.5 70.825,117.5 70.825,33.802 25.4,33.802

## Silkscreen, mask and mechanical layers (free items; w line width, h text height)
Top Overlay:
  text "MedBox v0.1 / Marcel Lis" at 31.725,108.725 h1.52
Mechanical 1:
  lines w0.254: 25.4,33.675 70.825,33.675 70.825,61.931 70.825,100.075 70.825,105.075 70.825,117 70.825,117.5 25.6,117.5 25.4,117.5 25.4,33.675